# Altium PCB PCB.PcbDoc
Units mm, origin at the board's own origin, x right, y up, seen from the top; angles counter-clockwise.
Board outline 79.99 x 63.99 mm, 4 copper layers (Top Layer, GND, PWR, Bottom Layer), stack 1.57 mm thick; 44 components, 35 nets, 179 pads, 54 vias.
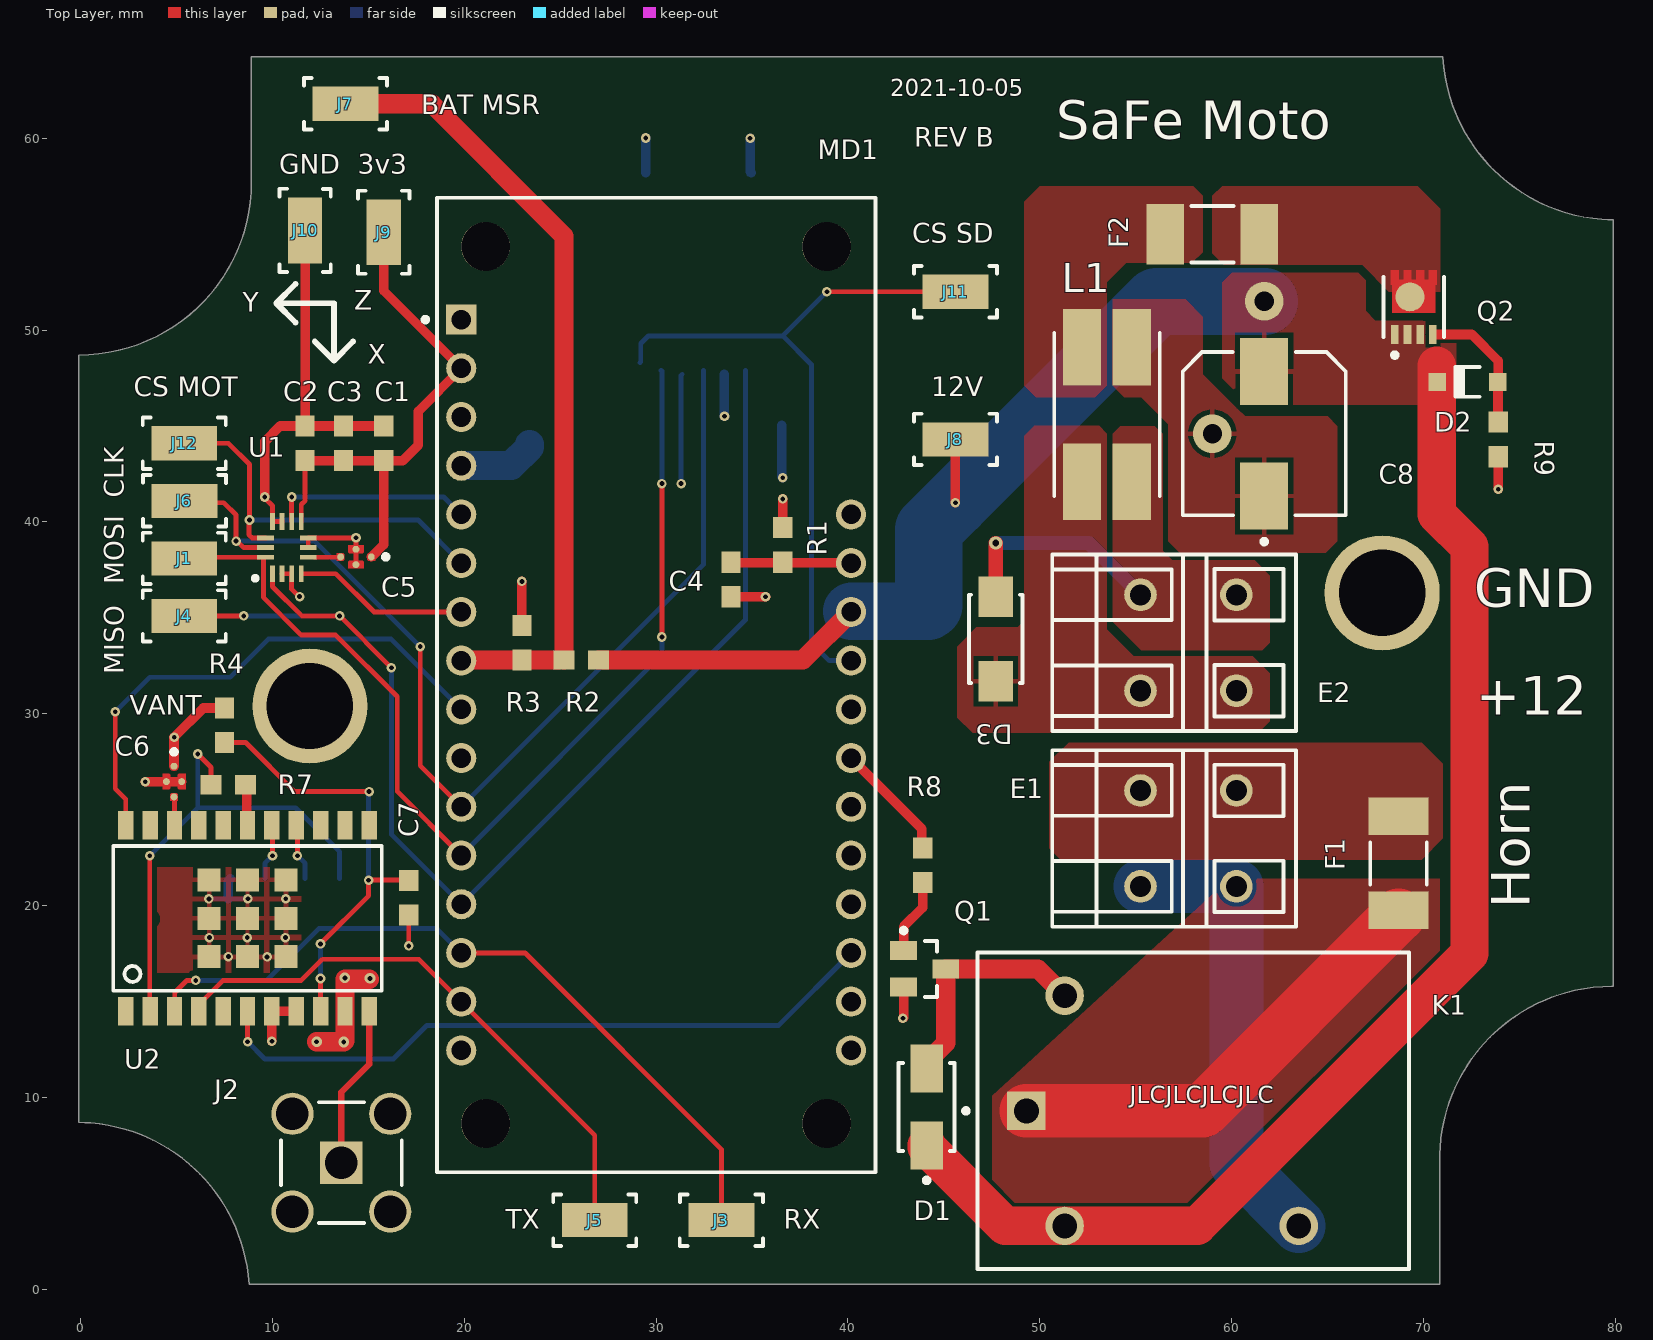
[diagram p0: Top Layer view]
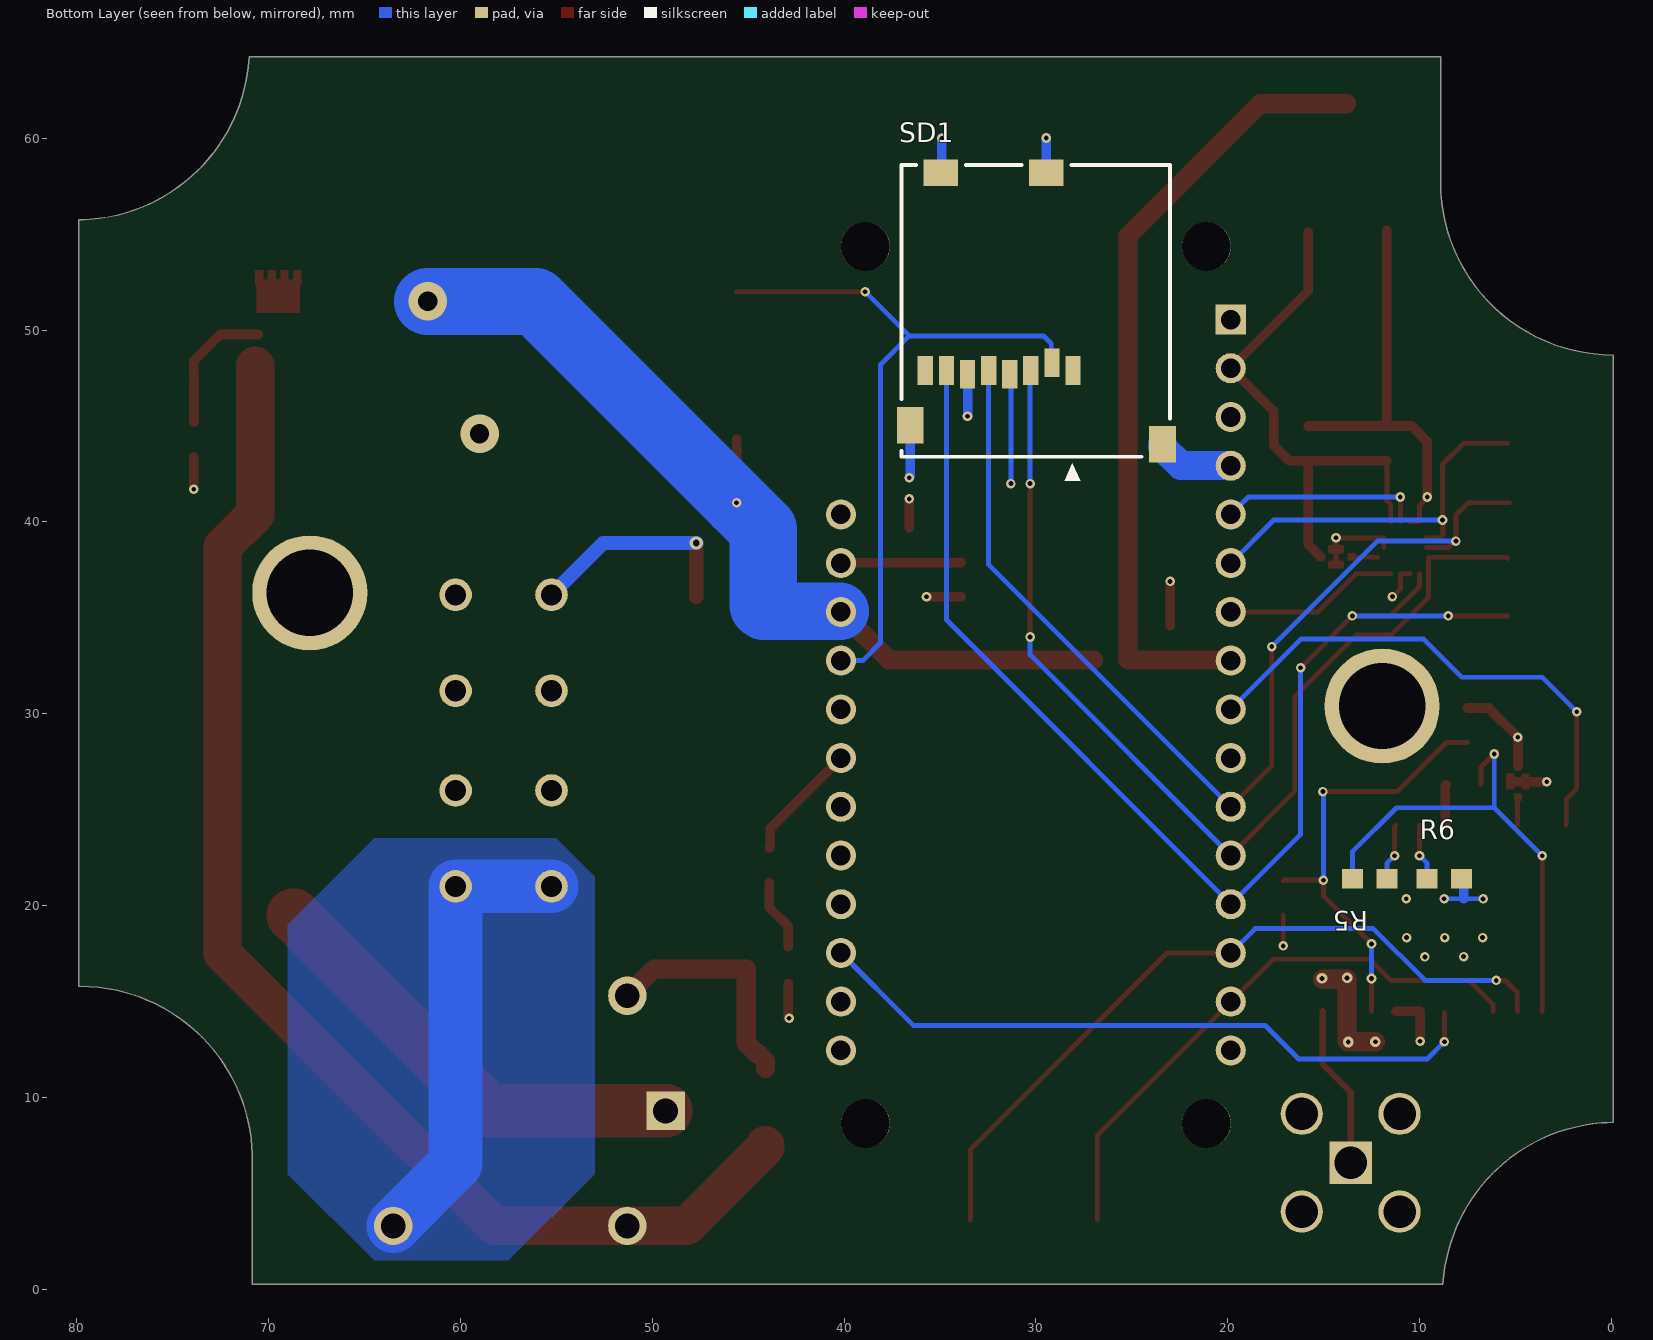
[diagram p1: Bottom Layer view, seen from below]
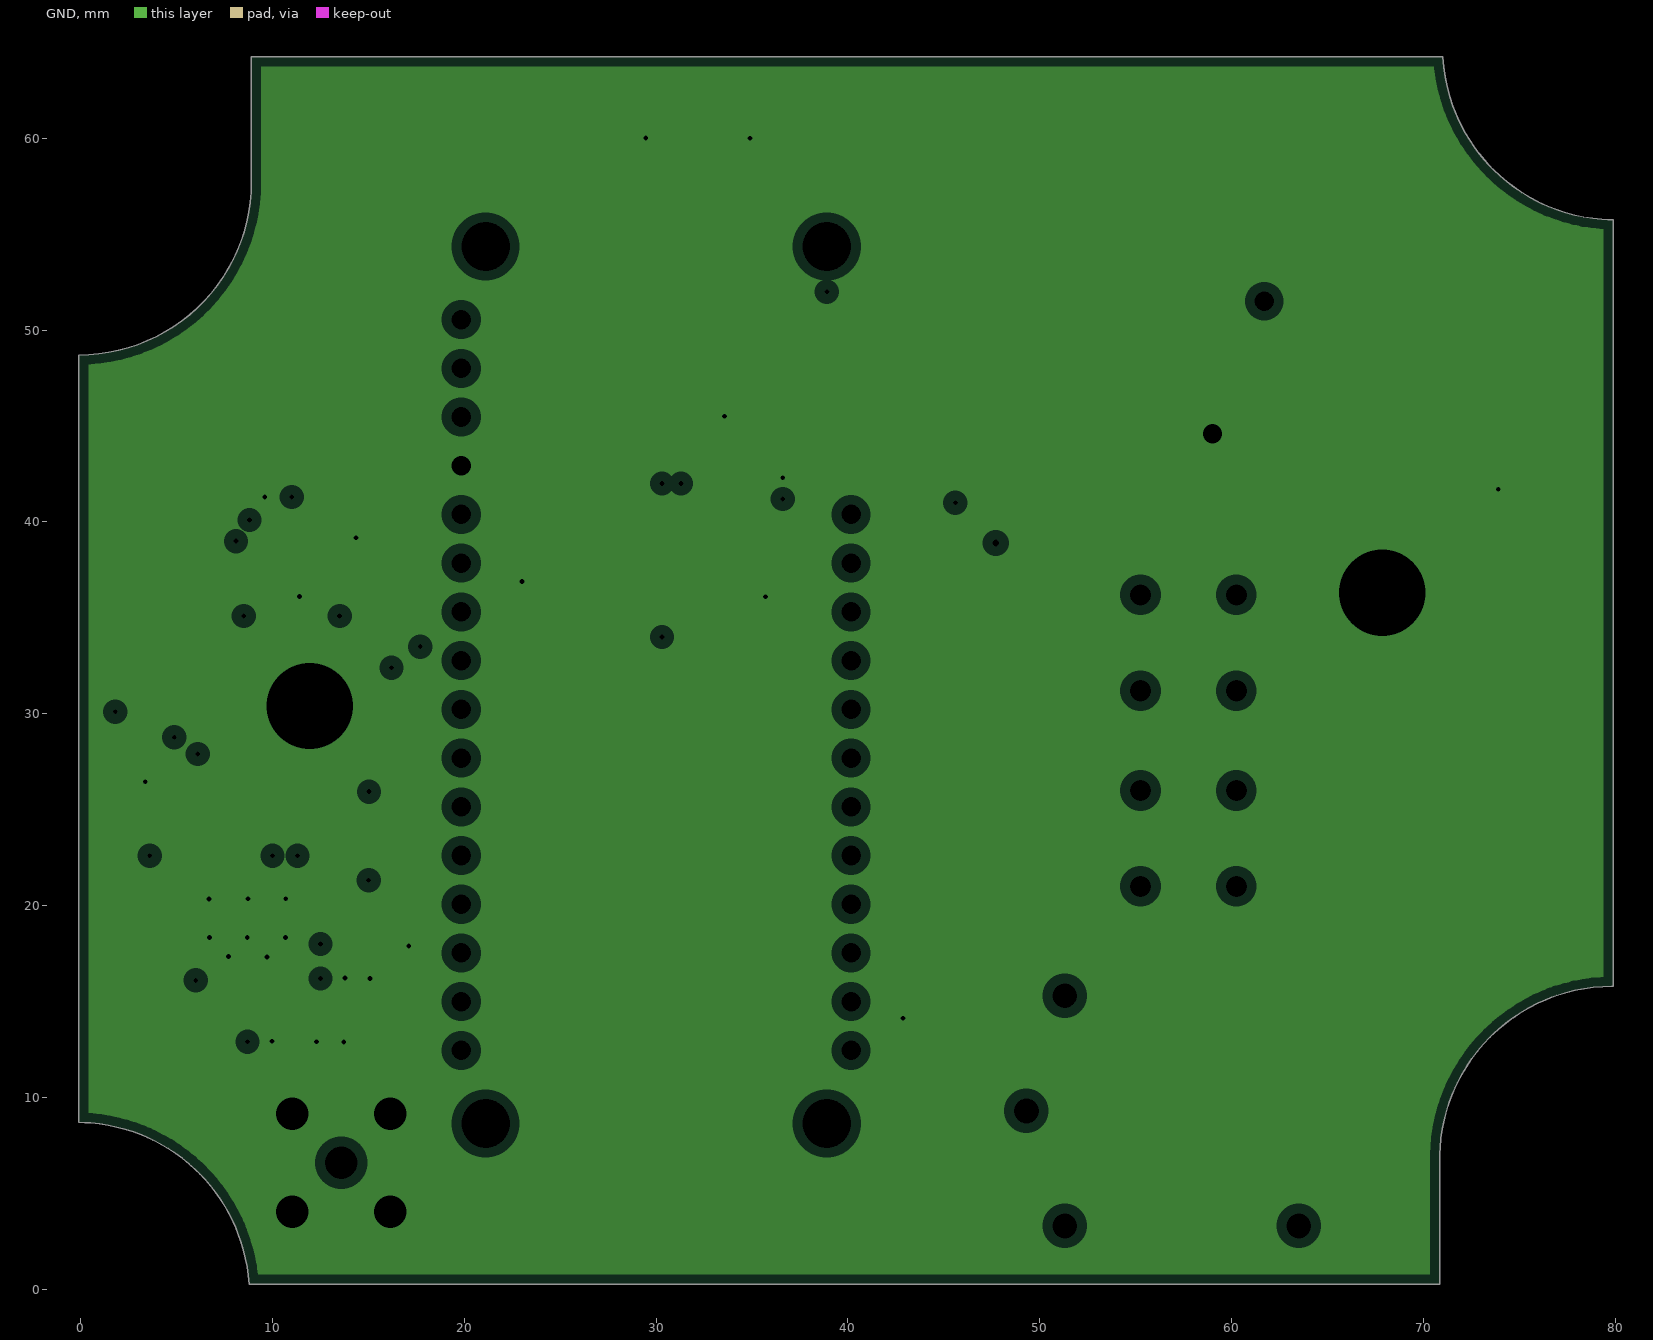
[diagram p2: GND, clearances drawn from the general rule]
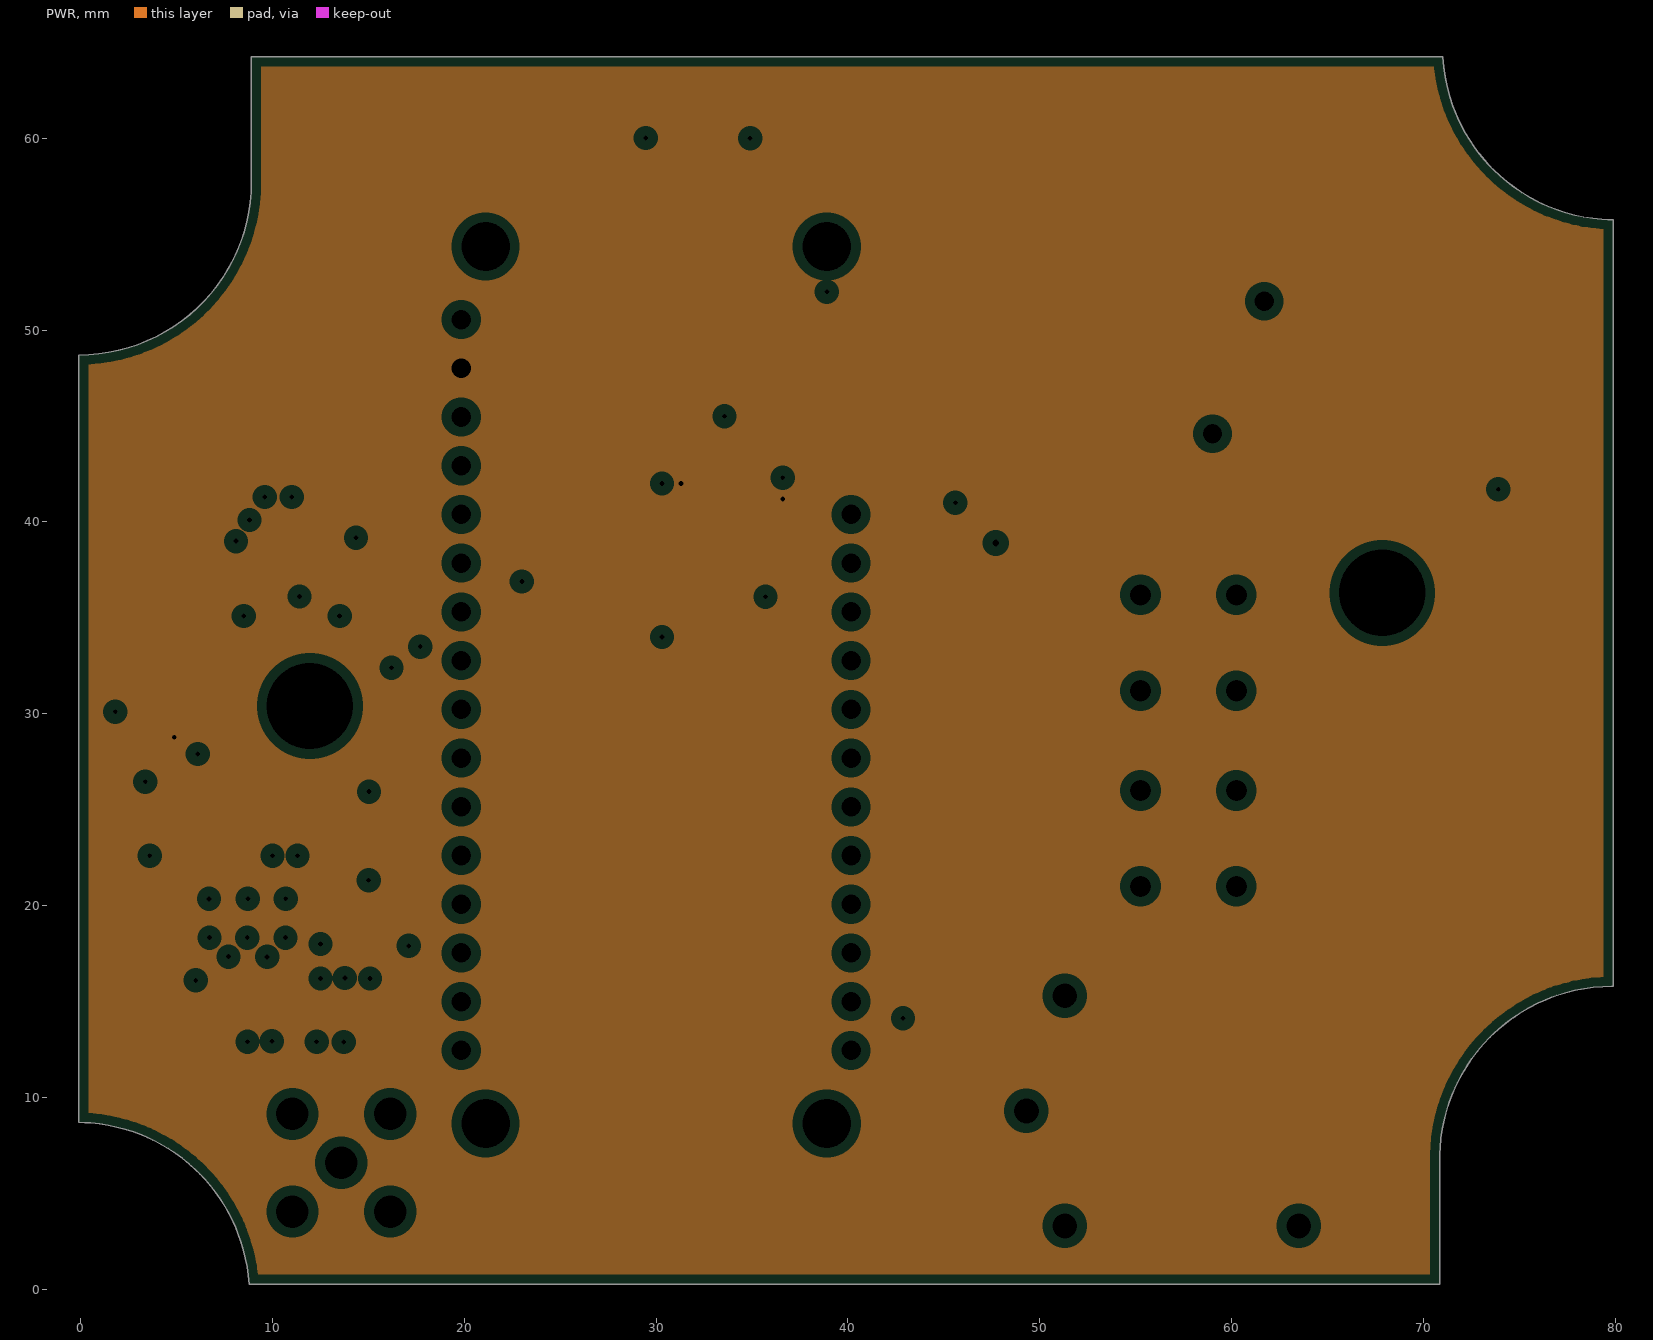
[diagram p3: PWR, clearances drawn from the general rule]
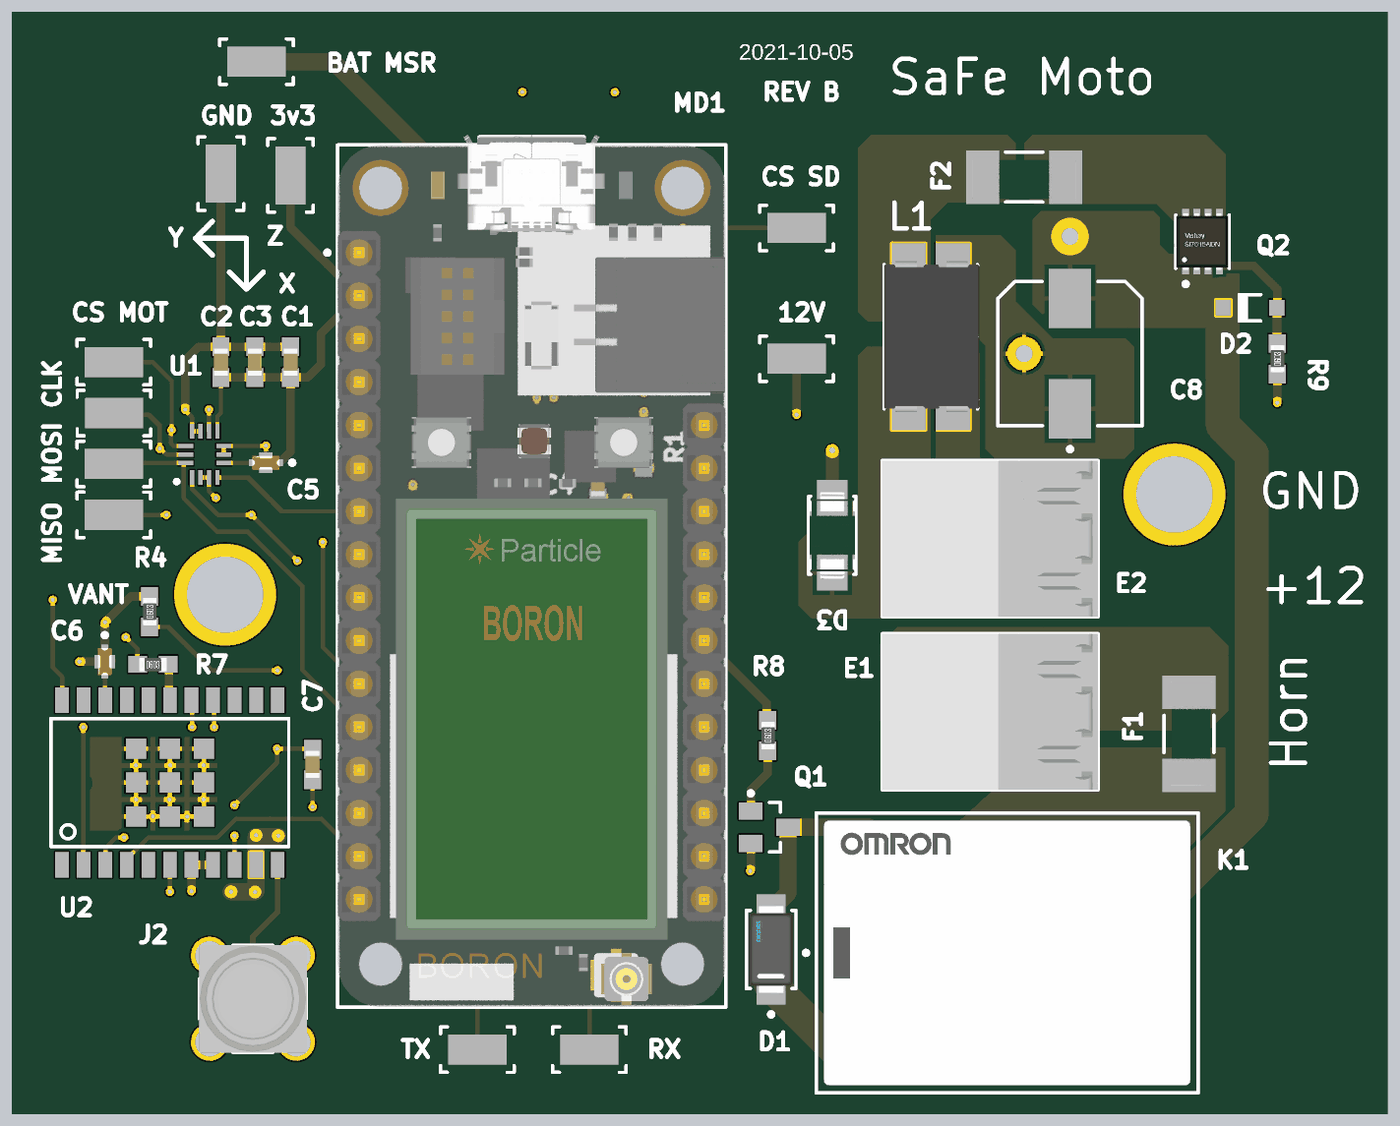
[diagram p4: 3D render of the assembled board from above, using the file's embedded part models]

## Layer stack, top to bottom
Top Solder: solder mask 0.0127, Solder Resist, Dk 3.8
Top Layer: signal copper 0.035
Dielectric 1: prepreg 0.2, 7628, Dk 4.6
GND: plane copper 0.0175, net GND
Core: core 1.065, FR-4, Dk 4.5
PWR: plane copper 0.0175, net +3v3
Dielectric 2: prepreg 0.2, 7628, Dk 4.6
Bottom Layer: signal copper 0.035
Bottom Solder: solder mask 0.0127, Solder Resist, Dk 3.8

## Board outline
6.44,5.769 cw(c-0.23,-0.317) 7.947,3.514 cw(c-0.157,-0.277) 8.199,2.918 cw(c-0.235,-0.307) 8.777,0.269 8.777,0.255 70.845,0.255 70.845,6.789 cw(c79.782,6.789) 70.864,7.382 cw(c79.878,6.782) 71.524,10.22 cw(c79.787,6.813) 71.775,10.774 cw(c79.872,6.77) 73.471,13.143 cw(c79.798,6.835) 73.914,13.559 cw(c79.863,6.761) 76.387,15.099 cw(c79.819,6.85) 76.956,15.313 cw(c79.851,6.756) 79.831,15.789 79.845,15.789 79.895,15.789 79.895,55.745 cw(c79.995,64.686) 79.303,55.771 cw(c80.002,64.776) 76.517,56.444 cw(c79.972,64.689) 75.96,56.7 cw(c80.013,64.771) 73.641,58.371 73.631,58.381 cw(c79.963,64.712) 73.192,58.852 cw(c80.018,64.76) 71.783,61.061 cw(c79.951,64.725) 71.534,61.677 cw(c80.022,64.751) 71.009,64.237 71.008,64.25 8.9,64.25 8.9,57.7 cw(c-0.1,57.7) -0.1,48.7 -0.1,8.699 cw(c-0.205,-0.248) 0.533,8.67 cw(c-0.212,-0.33) 3.171,8.043 cw(c-0.186,-0.251) 3.761,7.779 cw(c-0.222,-0.325) 5.988,6.23 cw(c-0.17,-0.261)

## Design rules (kind name [scope] priority, off if disabled: settings)
BoardOutlineClearance [All] p1: gap=0.5 ignorepadtopadclearanceinfootprint=FALSE
Clearance [InNetClass('All Nets')] p1: gap=0.2 ignorepadtopadclearanceinfootprint=TRUE except(0: Arc-Hole Track-Hole SMDPad-Hole THPad-Hole Via-Hole Fill-Hole Poly-Hole Region-Hole Text-Hole; 0.13: Arc-Arc Arc-Track Arc-SMDPad Track-Track Track-SMDPad SMDPad-SMDPad; 0.254: Arc-Via Arc-Text Track-Via Track-Text SMDPad-Via SMDPad-Text THPad-Via THPad-Text Via-Via Via-Text Fill-Text Poly-Text Region-Text Text-Text; 0.3: Via-Fill Via-Poly Via-Region; 0.5: THPad-THPad)
HoleSize [All] p1: absolutevalues=TRUE maxlimit=6.3 minlimit=0.025 maxpercent=80.000 minpercent=20.000
HoleToHoleClearance [All] p1: gap=0.5 allowstackedmicrovias=FALSE
PlaneClearance [All] p1: clearance=0.508
PlaneConnect [All] p1: planeconnectstyle=Relief reliefexpansion=0.508 reliefentries=4 reliefconductorwidth=0.254 reliefairgap=0.254
PolygonConnect [All] p1: connectstyle=Relief reliefconductorwidth=0.254 reliefentries=4 polygonreliefangle="90 Angle" airgapwidth=0.254
RoutingVias RoutingVias_1 [InNetClass('High Power')] p1: holewidth=4 width=3 viastyle="Through Hole" minholewidth=1 minwidth=2 maxholewidth=4 maxwidth=6
RoutingVias [All] p2: holewidth=0.25 width=0.5 viastyle="Through Hole" minholewidth=0.25 minwidth=0.5 maxholewidth=2 maxwidth=4
SolderMaskExpansion [All] p1: expansion=0.102 istentingtop=FALSE
Width GPS [InNetClass('RF')] p1: maxlimit=0.336 minlimit=0.336 preferedwidth=0.336 impedanceprofiledriven=TRUE impedanceprofileid={6959D812-79C8-45D8-8F7B-22DE37652A4B} impedanceprofilevalue=50.000000 minimp=50.000000 maximp=50.000000 favimp=50.000000
Width Horn [InNetClass('High Power')] p2: maxlimit=3.5 minlimit=2.8 preferedwidth=3 minimp=50.000000 maximp=50.000000 favimp=50.000000
Width [All] p3: maxlimit=5 minlimit=0.13 preferedwidth=0.254 minimp=50.000000 maximp=50.000000 favimp=50.000000
26 further rules are at their usual default settings.

## Classes and differential pairs
component class Power: C8 D2 D3 E2 F2 L1 Q2 R9
net class RF: NetJ2_1
net class "High Power": NetE1_A1 NetF1_1
component class Main: C1 C2 C3 C4 C5 C6 C7 D1 E1 F1 J1 J2 J3 J4 J5 J6 J7 J8 J9 J10 J11 J12 K1 MD1 Q1 R1 R2 R3 R4 R5 R6 R7 R8 SD1 U U1 U2

## Components (designator, comment, footprint, x,y, rotation, side; value= is the part's Value field where it differs from the comment)
C1 "Cap SMD" "C0603 (1608)" 15.8,44.1 r270 top value=2.2uF
C2 "Cap SMD" "C0603 (1608)" 11.7,44.1 r270 top value=100nF
C3 "Cap SMD" "C0603 (1608)" 13.7,44.1 r270 top value=10nF
C4 "Cap SMD" "C0603 (1608)" 33.9,37 r90 top value=10nF
C5 "NFM18PS105R0J3D" FP-NFM18-0_1-e0_05_0_35-MFG 14.35,38.175 r180 top
C6 "NFM18PS105R0J3D" FP-NFM18-0_1-e0_05_0_35-MFG 4.866,26.463 r270 top
C7 "Cap SMD" "C0603 (1608)" 17.1,20.4 r90 top value=10nF
C8 "UUD1A471MNL1GS" FP-UUD1A471MNL1GS-MFG 61.7,44.6 r90 top
D1 "ES2BA-13-F" FP-SMA-MFG 44.1,9.5 r90 top value=25pF
D2 "BZT52C16-7-F" DIOD-SOD123-2_V 72.3,47.3 r180 top
D3 "SMAJ24CA" FP-SMAJ-CA-MFG 47.7,33.9 r270 top
E1 "1884340000" LSF_SMT_5_00_135_02 57,23.5 r90 top
E2 "1884340000" LSF_SMT_5_00_135_02 57,33.7 r90 top
F1 "0451005.MRL" FP-0451-MFG 68.7,22.2 r90 top value=0.0125Ω
F2 "0451005.MRL" FP-0451-MFG 59,55 r0 top value=0.0125Ω
J1 "5015" FP-5015-MFG 5.4,38.1 r0 top
J2 "1053354-1" TECO-1053354-1_V 13.586,6.595 r270 top
J3 "5015" FP-5015-MFG 33.4,3.6 r180 top
J4 "5015" FP-5015-MFG 5.4,35.1 r0 top
J5 "5015" FP-5015-MFG 26.8,3.6 r180 top
J6 "5015" FP-5015-MFG 5.407,41.099 r0 top
J7 "5015" FP-5015-MFG 13.8,61.8 r180 top
J8 "5015" FP-5015-MFG 45.6,44.3 r180 top
J9 "5015" FP-5015-MFG 15.8,55.1 r90 top
J10 "5015" FP-5015-MFG 11.7,55.2 r90 top
J11 "5015" FP-5015-MFG 45.6,52 r0 top
J12 "5015" FP-5015-MFG 5.4,44.1 r0 top
K1 "G5LE-1A-E-DC12" FP-G5LE-1A-E-DC12-MFG 58,9.3 r180 top
L1 "7427521" WE-CMS 53.5,45.6 r90 top
MD1 "BRN402" FP-BRN402-0 30,31.5 r0 top locked
Q1 "BSS123" FAIR-SOT23-3_V 44,16.7 r270 top
Q2 "SI7615ADN-T1-GE3" FP-S16-2667_SINGLE-MFG 69.5,51.2 r90 top
R1 "Res" "R0603 (1608)" 36.6,38.8 r90 top
R2 "Res" "R0603 (1608)" 26.1,32.8 r0 top
R3 "Res" "R0603 (1608)" 23,33.7 r270 top
R4 "Res" "R0603 (1608)" 7.5,29.4 r90 top
R5 "Res" "R0603 (1608)" 12.6,21.4 r0 bottom
R6 "Res" "R0603 (1608)" 8.7,21.4 r180 bottom
R7 "Res" "R0603 (1608)" 7.7,26.3 r0 top
R8 "Res" "R0603 (1608)" 43.9,22.1 r90 top
R9 "Res" "R0603 (1608)" 73.9,44.3 r90 top
SD1 "2908-05WB-MG" 3M-2908-05WB-MG_V 30,51 r0 bottom
U1 "ICM-42688-P" ICM-42688-P 10.75,38.66 r90 top
U2 "A2200-A" XCVR_A2200-A 8.698,19.336 r90 top

## Footprints (in the part's own frame and the unit in brackets; to place one, negate y for a bottom-side part, rotate by r counter-clockwise, add the part's x,y. Pads: shape width x height; smd on the part's side, far side on the other; paste and mask are expansions set on the pad)
3M-2908-05WB-MG_V [mm] "Connector, MicroSD, 8 Position, Body 15.2x14mm, Pitch 1.1mm"
  rect 0.8x1.5 smd: 1(-1.94,3.1) 2(-0.84,2.7) 3(0.26,3.1) 4(1.36,3.3) 5(2.46,3.1) 6(3.56,3.3) 7(4.66,3.1) 8(5.76,3.1)
  rect 1.4x1.9 smd: 9(6.55,5.95) 12(-6.6,6.95)
  rect 1.8x1.4 smd: 10(4.95,-7.2) 11(-0.55,-7.2)
  silkscreen extent -7,-7.6 7,8.87, body extent -7,-7.6 7,7.6, height 1.85
"C0603 (1608)" [mm] "Chip Capacitor, 2-Leads, Body 1,60x0,81mm, IPC Low Density"
  rect 1.1x1 smd: 1(-0.9,0) 2(0.9,0)
  body extent -0.8,-0.41 0.8,0.42, height 0.79
DIOD-SOD123-2_V [mm] "SOD123, 2-Leads, Body 2.7x1.55mm, Height 1.45mm"
  rect 0.9x0.95 smd: 1(-1.575,0) 2(1.575,0)
  silkscreen extent -0.64,-0.82 0.64,0.77, body extent -1.35,-0.77 1.35,0.77, height 1.45
FAIR-SOT23-3_V [mm] "SOT23, 3-Leads, Body 2.92x1.3mm, Pitch 0.95mm"
  rect 1x1.4 smd: 1(-0.95,-1.1) 2(0.95,-1.1) 3(0,1.1)
  silkscreen extent -2.12,-1.22 1.46,0.65, body extent -1.46,-0.65 1.46,0.65, height 1.2
FP-0451-MFG [mil]
  rect 77x124 smd paste+0 mask+0: 1(-96.5,0) 2(96.5,0)
  silkscreen extent -43,-58 43,58, body extent -139,-66 139,66, height 10
FP-5015-MFG [mm]
  rect 3.43x1.78 smd paste+0 mask+0: 1(0,0)
  silkscreen extent -2.16,-1.34 2.17,1.34
FP-BRN402-0 [mm]
  rect 1.57x1.57 hole 1.02 paste-1000 mask+0: 1(-10.16,19.05)
  round 1.57 hole 1.02 paste-1000 mask+0: 2(-10.16,16.51) 3(-10.16,13.97) 4(-10.16,11.43) 5(-10.16,8.89) 6(-10.16,6.35) 7(-10.16,3.81) 8(-10.16,1.27) 9(-10.16,-1.27) 10(-10.16,-3.81) 11(-10.16,-6.35) 12(-10.16,-8.89) 13(-10.16,-11.43) 14(-10.16,-13.97) 15(-10.16,-16.51) 16(-10.16,-19.05) 17(10.16,-19.05) 18(10.16,-16.51) 19(10.16,-13.97) 20(10.16,-11.43) 21(10.16,-8.89) 22(10.16,-6.35) 23(10.16,-3.81) 24(10.16,-1.27) 25(10.16,1.27) 26(10.16,3.81) 27(10.16,6.35) 28(10.16,8.89)
  round 2.54 hole 2.54 unplated paste-1000 mask+0: ""(-8.89,-22.86) ""(-8.89,22.86) ""(8.89,-22.86) ""(8.89,22.86)
  silkscreen extent -12.15,-25.4 11.43,25.4, body extent -11.43,-25.4 11.43,26, height 8.93
FP-G5LE-1A-E-DC12-MFG [mm]
  rect 2x2 hole 1.3 paste-1000 mask+0: 1(8.7,0)
  round 2 hole 1.3 paste-1000 mask+0: 2(6.7,6) 3(-5.5,6) 5(6.7,-6)
  silkscreen extent -11.25,-8.25 11.97,8.25, body extent -11.35,-8.35 11.35,8.35, height 0.25
FP-NFM18-0_1-e0_05_0_35-MFG [mm]
  round 0.36 smd paste+0 mask+0: 1(-0.8,0) 2(0,0.4) 2(0,-0.4) 3(0.8,0)
  Top Layer region: -1,-0.2 -1,0.2 -0.65,0.2 -0.6,0.15 -0.6,-0.15 -0.65,-0.2 -1,-0.2
  Top Layer region: 1,-0.2 1,0.2 0.65,0.2 0.6,0.15 0.6,-0.15 0.65,-0.2 1,-0.2
  Top Layer region: -0.4,0.6 0.4,0.6 0.4,0.25 0.35,0.2 -0.35,0.2 -0.4,0.25 -0.4,0.6
  Top Layer region: -0.4,-0.6 0.4,-0.6 0.4,-0.25 0.35,-0.2 -0.35,-0.2 -0.4,-0.25 -0.4,-0.6
  silkscreen extent -1.68,-0.12 -1.43,0.12, body extent -1.1,-0.7 1.1,0.7, height 0.25
FP-S16-2667_SINGLE-MFG [mil]
  rect 39x16 smd paste+0 mask+0: 1(-56.5,39) 2(-56.5,13) 3(-56.5,-13) 4(-56.5,-39)
  round 59.4 smd paste+0 mask+0: 5-6-7-8(21,8)
  Top Layer region: -12,44 46,44 46,47 76,47 76,31 56,31 56,21 76,21 76,5 56,5 56,-5 76,-5 76,-21 56,-21 56,-31 76,-31 76,-47 46,-47 46,-44 -12,-44
  silkscreen extent -103,-62 62,62, body extent -80,-71 80,71, height 10
FP-SMA-MFG [mm]
  rect 2.5x1.7 smd paste+0 mask+0: 1(-2,0) 2(2,0)
  silkscreen extent -3.95,-1.46 2.3,1.46, body extent -3.35,-1.56 3.35,1.56, height 0.25
FP-SMAJ-CA-MFG [mm]
  rect 2.1x1.8 smd paste+0 mask+0: 1(-2.2,0) 2(2.2,0)
  silkscreen extent -2.3,-1.4 2.3,1.4, body extent -3.35,-1.5 3.35,1.5, height 0.25
FP-UUD1A471MNL1GS-MFG [mm]
  rect 3.5x2.5 smd paste+0 mask+0: 1(-3.25,0) 2(3.25,0)
  silkscreen extent -5.75,-4.25 4.25,4.25
ICM-42688-P [mm]
  rect 0.875x0.25 smd: 1(-1.36,0.75) 2(-1.36,0.25) 3(-1.36,-0.25) 4(-1.36,-0.75) 8(1.36,-0.75) 9(1.36,-0.25) 10(1.36,0.25) 11(1.36,0.75)
  rect 0.25x0.875 smd: 5(-0.5,-1.113) 6(0,-1.113) 7(0.5,-1.113) 12(0.5,1.113) 13(0,1.113) 14(-0.5,1.113)
  silkscreen extent -1.7,1.55 -1.5,1.75, body extent -1.5,-1.25 1.5,1.25, height 0.8
LSF_SMT_5_00_135_02 [mm] "OMNIMATE Signal - Serie LSF  LSF-SMT 5.00/02/135 3.5"
  round 1.7 hole 1.1: A1(-2.5,1.75) A1(-2.5,-3.25) A2(2.5,1.75) A2(2.5,-3.25)
  silkscreen extent -4.6,-6.35 4.6,6.35, body extent -4.6,-6.35 4.6,6.35, height 13.17
"R0603 (1608)" [mm]
  rect 1.1x1 smd: 1(-0.9,0) 2(0.9,0)
  body extent -0.8,-0.42 0.8,0.38, height 0.45
TECO-1053354-1_V [mm] "THD, 5-Leads, Body 6.3x6.3mm, Pitch 2.55mm"
  rect 2.2x2.2 hole 1.7: 1(0,0)
  round 2.2 hole 1.7: 2(-2.55,2.55) 3(-2.55,-2.55) 4(2.55,-2.55) 5(2.55,2.55)
  silkscreen extent -3.15,-3.15 3.15,3.15, body extent -3.17,-3.17 3.18,3.18, height 9.6
WE-CMS [mm] "Inductor, 4-Leads, Body 8.5x5.6mm"
  rect 4x2 smd: 1(-3.5,1.3) 2(3.5,1.3) 3(-3.5,-1.3) 4(3.5,-1.3)
  silkscreen extent -4.25,-2.75 4.25,2.75, body extent -4.45,-2.85 4.45,2.75, height 3.19
XCVR_A2200-A [mm]
  rect 1.5x0.8 smd: 1(-4.85,6.35) 2(-4.85,5.08) 3(-4.85,3.81) 4(-4.85,2.54) 5(-4.85,1.27) 6(-4.85,0) 7(-4.85,-1.27) 8(-4.85,-2.54) 9(-4.85,-3.81) 10(-4.85,-5.08) 11(-4.85,-6.35) 12(4.85,-6.35) 13(4.85,-5.08) 14(4.85,-3.81) 15(4.85,-2.54) 16(4.85,-1.27) 17(4.85,0) 18(4.85,1.27) 19(4.85,2.54) 20(4.85,3.81) 21(4.85,5.08) 22(4.85,6.35)
  rect 1.2x1.2 smd: 23(-2,2) 24(-2,0) 25(-2,-2) 26(0,-2) 27(0,0) 28(0,2) 29(2,2) 30(2,0) 31(2,-2)
  silkscreen extent -3.77,-7 3.77,7

## Part data
C5 C6: library part CMP-2000-06844-3, "Large Current 3 Terminals Low ESL Chip Multilayer Ceramic Capacitors for General Purpose, 0603, 1uF, 20%, 6.3V", Capacitance=1uF, Case Code (Imperial)=0603, Case Code (Metric)=1608, Current=2A, DC Resistance (DCR)=30mR, Insulation Resistance=500MR, Max Operating Temperature=105°C, Max Voltage Rating (DC)=6.3V, Min Operating Temperature=-55°C, Package Quantity=1, Tolerance=20%, Case/Package=0603, Current Rating=2A, Depth=0.8mm, Height=0.6mm, Lead Free="Lead Free", Length=1.6mm, Max Current Rating=2A, Mount="Surface Mount", Packaging="Tape and Reel", Radiation Hardening=No, REACH SVHC="No SVHC", Termination=Flat, Voltage=6.3V, Voltage Rating=6.3V, Voltage Rating (DC)=6.3V, Weight=7.1E-05oz, Width=0.8mm
C8: library part CMP-0687-00070-2, "CAP ALUM 470UF 20% 10V SMD", Capacitance=470uF, Case/Package=Radial, Dielectric Material=Aluminium, Leakage Current=3uA, Max Operating Temperature=105°C, Min Operating Temperature=-55°C, Package Quantity=500, Ripple Current=450mA, Tolerance=20%, Voltage=10V, Diameter=8mm, Dissipation Factor=0.24%, Height=10mm, Height - Seated (Max)=0.394inch, Impedance=170mR, Lead Diameter=1.1mm, Lead Free="Lead Free", Lead Pitch=3.1mm, Length=10mm, Life (Hours)=5000Hour, Number of Pins=2, Packaging="Tape and Reel", Radiation Hardening=No, REACH SVHC="No SVHC", Ripple Current (AC)=450mA, Termination=SMD/SMT, Voltage Rating=10V, Voltage Rating (DC)=10V
D1: library part CMP-12791-000037-1, "DIODE GEN PURP 100V 2A SMA", Capacitance=25pF, Forward Current=2A, Manufacturer="Diodes Inc.", Max Junction Temp=+150°C, Max Repetitive Reverse Voltage=100V, Max Surge Forward Current=50A, Package=SMA, Peak Reverse Current=5uA, Temperature="-55°C to +150°C", Temperature Range Low=-55°C, Automotive=No, Category=Diode, ComponentLink2Description=Datasheet, ComponentLink2URL=https://www.diodes.com/assets/Datasheets/ds14002.pdf, Device Class L1="Discrete Semiconductors", Device Class L2=Diodes, Device Class L3="Rectifier Diodes", Digikey Description="DIODE GEN PURP 100V 2A SMA", Footprint Url=https://www.diodes.com/assets/Package-Files/SMA.pdf, Height=2.4mm, Lead Free=Yes, Manufacturer Part Number=ES2BA-13-F, Mouser Description="ES2BA Series 100 V 2 A Surface Mount Super-Fast Rectifier - DO-214AC", Octopart=https://octopart.com/es2ba-13-f-diodes+inc.-14402013, Reverse Voltage=100V, RoHS=TRUE, Standoff Height=0.05mm, Temperature Range High=+150°C
D2: library part CMP-0860-00001-1, "Surface Mount Zener Diode, 16 V, -65 to 125 degC, SOD123, RoHS, Tape and Reel", Manufacturer="Diodes Inc", Maximum Reverse Current="0.1 uA", Operating Temperature="-65 to 150 degC", Power Max="500 mW", Voltage Zener="16 V Typ.", ComponentLink1Description="Manufacturer URL", ComponentLink1URL=http://www.diodes.com/, ComponentLink2Description=Datasheet, ComponentLink2URL=http://www.diodes.com/datasheets/ds18004.pdf, ComponentLink3Description="Package Specification", ComponentLink3URL=http://www.diodes.com/datasheets/ap02002.pdf, DatasheetVersion="Rev. 37-2", Maximum Zener Impedance f="1 kHz ZZK=200 Ohm", Mounting Technology="Surface Mount", PackageDescription="2-Pin SOD123, Body 2.7 x 1.55 mm, Height 1.45 mm", PackageReference=SOD123, PackageVersion="Rev. 79", Packing="Tape and Reel", PartNumber=BZT52C16-7-F, RoHS=TRUE, Tol V="5.56% Typ."
D3: library part CMP-2000-07087-2, "TVS DIODE 24V 38.9V DO214AC", Breakdown Voltage=26.7V, Clamping Voltage=38.9V, Manufacturer=Littelfuse, Max Junction Temp=+150°C, Package=SMAJ-CA, Peak Pulse Current=10.3A, Peak Pulse Power=400W, Reverse Standoff Voltage=24V, Temperature="-65°C to +150°C", Temperature Range Low=-65°C, Automotive=No, Category=Diode, ComponentLink2Description=Datasheet, ComponentLink2URL=https://www.littelfuse.com/~/media/electronics/datasheets/tvs_diodes/littelfuse_tvs_diode_smaj_datasheet.pdf.pdf, Device Class L1="Circuit Protection", Device Class L2="TVS Diodes", Device Class L3=unset, Digikey Description="TVS DIODE 24V 38.9V DO214AC", Direction=Bidirectional, Height=2.29mm, Lead Free=Yes, Manufacturer Part Number=SMAJ24CA, Mouser Description="In a Pack of 25, Littelfuse SMAJ24CA, Bi-Directional TVS Diode, 400W, 2-Pin DO-214AC", Number Of Channels=1, Octopart=https://octopart.com/smaj24ca-littelfuse-350011, RoHS=TRUE, Temperature Range High=+150°C
E1 E2: library part CMP-1559-02276-1, "OMNIMATE Signal - series LSF", Colour=Black, Manufacturer=Weidmueller, Rated_current_min_no_of_poles_TU_20_deg_C="19 A", Rated_current_use_group_B_UL_1059="12 A", Rated_voltage_for_surge_voltage_class_pollution_degree_II_2="500 V", Rated_voltage_use_group_B_UL_1059="300 V", UL_94_flammability_rating=V-0, ComponentLink1Description="Manufacturer URL", ComponentLink1URL=http://www.weidmueller.com/, ComponentLink2Description="URL Link1", ComponentLink2URL=http://catalog.weidmueller.com/catalog/Start.do?localeId=en&ObjectID=1884340000, Contact_material=Cu-Leg, Contact_surface=tinned, Insulating_material="LCP GF", Mounting_onto_the_PCB="Reflow solder connection", No_of_poles=2, PackageReference=LSF_SMT_5_00_135_02, Packaging=Tube, PartNumber=1884340000, Pitch_inch="0,197 inch", Pitch_mm="5 mm", Qty="60 PCS", Revision=V1, Short_text_for_material="LSF-SMT 5.00/02/135 3.5SN BK TU", Side_termination_characteristic="closed side", Solder_pin_length_mm="3,5 mm", Solid_max_H05_07_V_U="1,5 mm²", Solid_min_H05_07_V_U="0,2 mm²", Wire_cross_section_AWG_max_UL_1059="AWG 16", Wire_cross_section_AWG_min_UL_1059="AWG 24"
F1 F2: library part CMP-2000-05653-2, "FUSE BRD MNT 5A 125VAC/VDC 2SMD", Fuse Current=5A, Fuse Interrupt Ac Current=50A, Manufacturer="Littelfuse Inc", Max Fuse Ac Voltage=125V, Package=0451, Resistance=0.0125Ω, Temperature="-55°C to +125°C", Temperature Range High=+125°C, Temperature Range Low=-55°C, Automotive=No, Category=Fuse, ComponentLink2Description=Datasheet, ComponentLink2URL=https://www.littelfuse.com/~/media/electronics/datasheets/fuses/littelfuse_fuse_451_453_datasheet.pdf.pdf, Device Class L1="Circuit Protection", Device Class L2=Fuses, Device Class L3=unset, Digikey Description="FUSE BRD MNT 5A 125VAC/VDC 2SMD", Fuse Blow Speed=Fast, Fuse I2T=5.566A2Sec, Fuse Interrupt Dc Current=50A, Height=2.94mm, Lead Free=Yes, Manufacturer Part Number=0451005.MRL, Max Fuse Dc Voltage=125V, Mouser Description="Surface Mount Fuses 125V 5A", Octopart=https://octopart.com/0451005.mrl-littelfuse-566389, RoHS=TRUE, Voltage Rating=125V
J1 J3 J4 J5 J6 J7 J8 J9 J10 J11 J12: library part CMP-2000-05183-2, "PC TEST POINT MINIATURE", Manufacturer=keystone, Automotive=No, Category=Conn, ComponentLink2Description=Datasheet, ComponentLink2URL=http://www.keyelco.com/product-pdf.cfm?p=1353, Conn Orientation=Straight, Contact Material=Silver, Device Class L1=Connectors, Device Class L2=unset, Device Class L3=unset, Digikey Description="PC TEST POINT MINIATURE", Height=1.65mm, Lead Free=Yes, Manufacturer Part Number=5015, Number of contacts=1, Octopart=https://octopart.com/5015-keystone-3822, Package=5015, RoHS=TRUE
J2: library part CMP-2000-05830-1, "Female Coaxial Connector, Pitch 2.55 mm, Height 9.5 mm, Tail Length 3.9 mm, RoHS, Bulk", Manufacturer="TE Connectivity", Package Description="Female Coaxial Connector, Pitch 2.55 mm, Height 9.5 mm, Tail Length 3.9 mm", Standard Package=125, 3D Model=1053354-1.pdf, Category=Connectors,Interconnects, Connector Style=SMA, Connector Type=Jack,FemaleSockets, Contact Termination=Solder, Datasheet URL=http://www.te.com/commerce/DocumentDelivery/DDEController?Action=srchrtrv&DocNm=1053354&DocType=Customer+Drawing&DocLang=English, Datasheet Version="Rev. B, 05/2011", Dynamic Catalog=SMA, Family=CoaxialConnectors(RF), Fastening Type=Threaded, Impedance=50Ohm, Manufacturer URL=http://www.te.com/, Mounting Technology=ThroughHole, Mounting Type=ThroughHole, Other Names="2062000000 / A30046", Package Reference=1053354-1, Packaging=Bulk, RoHS Information=1053354-1StatementofCompliance, Series=SMA
K1: library part CMP-08822-000128-1, "RELAY GEN PURPOSE SPST 16A 12V", Coil Current=33.3mA, Coil Power=400mW, Coil Resistance=360R, Coil Voltage (DC)=12V, Contact Current Rating=16A, Max Operating Temperature=85°C, Max Voltage Rating (AC)=250V, Min Operating Temperature=-40°C, Package Quantity=100, Coil Type=Non-Latching, Contact Material=Tin, Depth=16.5mm, Height=19mm, Lead Free="Lead Free", Length=22.5mm, Max Current Rating=16A, Mount="Through Hole", Number of Pins=4, Operate Time=10ms, Packaging=Tray, Power Consumption=400mW, Relay Type="General Purpose", Release Time=5ms, RoHS Compliant=Yes, Series=G5LE, Termination=Solder, Throw Configuration=SPST, Voltage Rating (AC)=250V, Weight=12g, Width=16.5mm
L1: library part CMP-0220-00057-1, "Common Mode SMD Bead WE-CMS, Z = 52 Ohm", ComponentLink1Description="Manufacturer Link", ComponentLink1URL=http://www.we-online.com, ComponentLink2Description=Datasheet, ComponentLink2URL=http://www.we-online.de/katalog/media/pdf/7427521.pdf, DatasheetVersion="ver 8, Jul-2010", Impedance="52 Ohm", PackageDescription="Inductor, 4-Leads, Body 8.5 x 5.6 mm", PackageReference=WE-CMS, PackageVersion=2010
MD1: library part CMP-201502-000001-1, "BORON LTE", Manufacturer=Particle, Max Frequency=3000MHz, Max Supply Voltage=4.4V, Min Supply Voltage=3V, Nominal Supply Current=70-100000uA, Temperature="-20°C to +60°C", Temperature Range High=+60°C, Temperature Range Low=-20°C, Automotive=No, Bandwidth=2302MHz, Category=UNK, ComponentLink2Description=Datasheet, ComponentLink2URL=https://docs.particle.io/assets/pdfs/datasheets/boron-datasheet.pdf, Data Rate=2000kbits/s, Device Class L1="Integrated Circuits (ICs)", Device Class L2="RF Semiconductors and Devices", Device Class L3=Transceivers, Digikey Description="BORON LTE", Interface=I2C,SPI,UART,USB, Lead Free=Yes, Manufacturer Part Number=BRN402, Number Of Adc Channels=6, Number Of Gpio=20, Octopart=https://octopart.com/brn402-particle-96116406, Package=BRN402, RoHS=TRUE
Q1: library part CMP-2000-04934-1, "N-Channel Logic Level Enhancement Mode Field Effect Transistor, 1.7 V, -55 to 150 degC, 3-Pin SOT-23, RoHS, Tape and Reel", Manufacturer=Fairchild, Maximum Continuous Drain Current=0.17A, Maximum Drain Source Voltage=100V, Maximum Gate Source Voltage=±20V, Operating Temperature=-55to150degC, Package=3SOT-23, Package Description="3-Pin Small Outline Transistor, Body 2.92 x 1.325 mm, Pitch 0.95 mm", Package Reference=SOT23-3, Package Version="Rev. 12, 03/2016", Category=MOSFET, Channel Mode=Enhancement, Channel Type=N, Datasheet URL=https://www.fairchildsemi.com/datasheets/BS/BSS123.pdf, Datasheet Version=Jun-03, Manufacturer URL=https://www.fairchildsemi.com/, Mounting=SurfaceMount, Package URL=http://www.fairchildsemi.com/dwg/MA/MA03D.pdf, Packaging=Tape&Reel, Rad Hard=No, RDS-on=6000@10VmOhm, Typical Fall Time=2.4ns, Typical Rise Time=9ns, Typical Turn-Off Delay Time=17ns, Typical Turn-On Delay Time=1.7ns
Q2: library part CMP-02550-000167-1, "MOSFET P-CH 20V 35A 1212-8S", Continuous Drain Current=-22.1A, Drain To Source Breakdown Voltage=-20V, Drain To Source Resistance=0.0035Ω, Gate To Source Voltage=12V, Input Capacitace At Vds="5590pF @ -10V", Manufacturer=Vishay, Max Forward Diode Voltage=-1.1V, Max Junction Temp=+150°C, Package=S16-2667_SINGLE, Power Dissipation=3.7W, Pulse Drain Current=-80A, Temperature="-55°C to +150°C", Temperature Range Low=-55°C, Typ Forward Diode Voltage=-0.72V, Automotive=No, Category=Trans, ComponentLink2Description=Datasheet, ComponentLink2URL=http://www.vishay.com/docs/62667/si7615adn.pdf, Depletion Mode=False, Device Class L1="Discrete Semiconductors", Device Class L2=Transistors, Device Class L3=MOSFETs, Digikey Description="MOSFET P-CH 20V 35A 1212-8S", Drain To Source Voltage=-20V, Gate Charge At Vgs="122nC @ -10V", Height=1.12mm, Lead Free=Yes, Manufacturer Part Number=SI7615ADN-T1-GE3, Mouser Description="MOSFET -20V 4.4mOhm@10V 35A P-Ch G-III", Number Of Channels=1, Number Of P Channels=1, Octopart=https://octopart.com/si7615adn-t1-ge3-vishay-45331111, Reverse Recovery Charge=11nC, Reverse Recovery Time=27ns, RoHS=TRUE, Rthja Max=33°C/W, Standoff Height=0mm, Temperature Range High=+150°C, Threshold Vgs Max=-1.5V, Threshold Vgs Min=-0.4V, Transconductance=82S, Turn Off Delay Time=85ns, Turn On Delay Time=13ns
R1 R2 R3 R4 R5 R6 R7 R8 R9: library part "Resistor EU"
SD1: library part CMP-2000-05030-1, "Card Connector Micro-SD, 500 VAC, 100 mOhm Min, 0.5 A, RoHS, Tape and Reel", Manufacturer=3M, Package Description="8-Pin Surface Mount Device, Body 15.2 x 14 mm, Pitch 1.1 mm", Standard Package=1, Card Type=SecureDigital-microSD™, Catalog Drawings=2908-05WB-MG, Category=Connectors,Interconnects, Connector Type=ConnectorandEjector, Contact Finish=Gold, Contact Finish Thickness=15µin(0.38µm), Datasheet URL=http://datasheet.octopart.com/2908-05WB-MG-3M-datasheet-6398107.pdf, Datasheet Version=Oct-06, Ejector Side=-, Family=MemoryConnectors-PCCardSockets, Featured Product=3MCardConnectormicroSD, Features=Switch, Height Above Board="0.073\"(1.85mm)", Insertion, Removal Method=PushIn,PushOut, Manufacturer URL=http://www.3m.com/, Mounting Feature=Normal,Standard-Top, Mounting Type=SurfaceMount,RightAngle, Number of Positions=10(8+2), Online Catalog=2900Series, Other Names=3M5607CT, Other Related Documents=SDCardDateCodeDecipher, Package Reference=2908-05WB-MG, Packaging=CutTape(CT), PCN Obsolescence/ EOL=2908Series30/Jun/2010, Series=2900
U2: "SiRFstarIVâ„¢ RF Receiver GPS 1.575GHz -163dBm 115.2kbps Module", Package="Module Maestro Wireless", Availability=Unavailable, MF="Maestro Wireless", MP=A2200-A, Price=None, SnapEDA_Link=https://www.snapeda.com/parts/A2200-A/Maestro%20Wireless%20Solutions/view-part/51723/?ref=snap

## Free pads (board coordinates)
  round 6 hole 4.5: 3(11.95,30.4) 5(67.85,36.3)

## Via types
v1: diameter 0.5, hole 0.25, Top Layer to Bottom Layer, 47 vias
v2: diameter 0.55, hole 0.25, Top Layer to Bottom Layer, 4 vias
v3: diameter 2, hole 1, Top Layer to Bottom Layer, 2 vias
v4: diameter 0.7, hole 0.35, Top Layer to Bottom Layer, 1 vias

## Nets (pads, with @x,y where several pads share a name; then routed paths per layer and width w, separated by ;. In a path a pad name is that pad's centre, name@x,y a point inside that pad or via, vN(x,y) a via of type N, cw(c..) or ccw(c..) an arc to the next point about the centre after c; other vN are vias at no path point)
+1v8: R5.2 R7.1 U2.2 | length 26.1
  Top Layer w0.254: v1(3.6,22.6) 3.6,14.504 U2.2 ; v1(6.1,27.9) 6.8,27.2 R7.1
  Bottom Layer w0.254: v1(3.6,22.6) 6.1,25.1 ; v1(6.1,27.9) 6.1,25.1 ; R5.2 13.5,22.8 11.2,25.1 6.1,25.1
+3v3: C1.2 C2.2 C3.2 C5.1 C6.1 J9.1 MD1.2 R1.2 R4.2 SD1.4 U1.8 | length 40.5
  Top Layer w0.254: U1.8 11.5,40.908 11.7,41.108 C2.2
  Top Layer w0.5: C6.1 4.866,28.766 v1(4.88,28.78) 6.4,30.3 R4.2 ; C2.2 C3.2 C1.2 ; C5.1 15.8,38.825 C1.2 ; J9.1 15.8,52.05 MD1.2 17.6,45.77 17.6,44 16.8,43.2 C1.2 ; R1.2 v1(36.6,41.2)
  Bottom Layer w0.254: v1(31.3,42) 31.3,47.64 SD1.4
+12: C8.2 D1.1 D2.2 J8.1 K1.2 MD1.26 Q2.1 Q2.2 Q2.3 R2.2 | length 115.2
  Top Layer w0.5: v1(45.6,41) J8.1
  Top Layer w1: R2.2 37.65,32.8 MD1.26
  Top Layer w2: D1.1 44.1,7.4 48.2,3.3 K1.2 58.2,3.3 72.4,17.5 72.4,38.7 70.7,40.4 70.7,48.14
  Bottom Layer w3: MD1.26@40.191,35.341 44.2,35.341
  Bottom Layer w3.5: 44.212,35.638 44.212,39.612 v1(45.6,41) 56.1,51.5 v3(61.7,51.5)
"Battery Measure": J7.1 MD1.8 R2.1 R3.2 | length 41.5
  Top Layer w1: J7.1 18.3,61.8 25.2,54.9 R2.1 ; MD1.8@19.87,32.8 R3.2 24.9,32.8 R2.1@25,32.9
CS_MOTION: J12.1 MD1.6 U1.12 | length 20.4
  Top Layer w0.254: J12.1 7.7,44.1 8.8,43 v1(8.8,40.1) 8.769,40.069 8.769,39.331 8.94,39.16 U1.12
  Bottom Layer w0.254: v1(8.8,40.1) 17.59,40.1 MD1.6
CS_SD: J11.1 MD1.25 SD1.2 | length 37.6
  Top Layer w0.254: v1(38.9,52) J11.1
  Bottom Layer w0.254: SD1.2 29.2,48.34 29.2,49.3 29.6,49.7 36.6,49.7 ; v1(38.9,52) 36.6,49.7 ; MD1.25 39.03,32.77 38.1,33.7 38.1,48.2 36.6,49.7
GND: C1.1 C2.1 C3.1 C4.1 C5.2 C6.2 C7.1 C8.1 J2.2 J2.3 J2.4 J2.5 J10.1 L1.4 MD1.4 pad.3 pad.5 Q1.2 R3.1 R6.2 R9.1 SD1.6 SD1.9 SD1.10 SD1.11 SD1.12 U1.2 U1.3 U1.6 U1.7 U1.10 U1.11 U2.7 U2.8 U2.10 U2.23 U2.24 U2.25 U2.26 U2.27 U2.28 U2.29 U2.30 U2.31 | length 63.5
  Top Layer w0.254: v1(9.6,41.3) 9.6,41.238 10,40.838 U1.11 U1.10 ; U1.2 U1.3 11,36.5 11.39,36.11 v1(11.41,36.11) ; U1.6 U1.7 11.865,39.162 14.338,39.162 v1(14.354,39.178) 14.354,38.579 14.35,38.575 C5.2@14.35,37.775 ; v1(17.1,17.9) C7.1
  Top Layer w0.5: v1(3.371,26.46) 3.374,26.463 4.466,26.463 C6.2@5.266,26.463 ; v1(9.6,41.3) 9.6,44.2 10.4,45 C1.1 ; v1(9.968,12.932) U2.7 U2.8 ; C2.1 J10.1 ; R3.1 v1(23,36.9) ; C4.1 v1(35.7,36.1) ; v1(42.864,14.126) 42.9,14.162 Q1.2 Q1.2@42.9,15.95 ; R9.1 73.9,41.704 v1(73.904,41.7)
  Top Layer w1: v2(12.3,12.9) v2@13.714,12.9 ; v2@13.778,12.953 13.778,16.161 v2@15.048,16.161
  Bottom Layer w0.254: v1(6.685,20.349) 6.691,20.355 8.71,20.355 v1(8.717,20.361)
  Bottom Layer w0.5: 7.689,20.36 7.689,21.289 R6.2 ; SD1.11 29.45,60.01 v1(29.453,60.014) ; SD1.6 33.56,45.519 v1(33.565,45.513) ; v1(34.9,60) 34.9,58.25 SD1.10 ; SD1.9 36.55,42.35 v1(36.6,42.3)
  Bottom Layer w1.5: MD1.4 19.853,42.943 22.443,42.943 23.4,43.9 SD1.12
  other v1: 9.72,17.327 7.701,17.339 6.71,18.33 8.679,18.33 10.673,18.33 10.686,20.361
  other v2: 13.714,12.889 15.083,16.2 13.773,16.23
  other v3: 59,44.6
GPS_ON: MD1.19 U2.6 | length 35.7
  Top Layer w0.254: v1(8.7,12.9) U2.6@8.7,14.434
  Bottom Layer w0.254: v1(8.7,12.9) 9.6,12 16.3,12 18.052,13.752 36.382,13.752 MD1.19
GPS_RST: MD1.9 U2.22 | length 27.3
  Top Layer w0.254: v1(1.8,30.1) 1.8,26.1 2.348,25.552 U2.22
  Bottom Layer w0.254: v1(1.8,30.1) 3.6,31.9 7.8,31.9 9.8,33.9 16.17,33.9 MD1.9
Horn: MD1.23 R8.2 | length 6.2
  Top Layer w0.5: MD1.23 43.843,24.007 43.843,23.057 R8.2
INT1: MD1.7 U1.4 | length 9.2
  Top Layer w0.254: U1.4 13.3,37.3 15.29,35.31 MD1.7
INT2: MD1.5 U1.9 | length 10.5
  Top Layer w0.254: U1.9 v1(11,41.3)
  Bottom Layer w0.254: v1(11,41.3) 18.93,41.3 MD1.5
MISO: J4.1 MD1.13 SD1.7 U1.1 | length 64.5
  Top Layer w0.254: J4.1 v1(8.5,35.1) ; U1.1 10,36.628 11.528,35.1 v1(13.5,35.1) v1(16.2,32.4)
  Bottom Layer w0.254: v1(8.5,35.1) v1(13.5,35.1) ; v1(16.2,32.4) 16.2,23.71 MD1.13 34.66,34.89 SD1.7
MOSI: J1.1 MD1.12 SD1.3 U1.14 | length 54.5
  Top Layer w0.254: J1.1 5.458,38.158 U1.14@9.326,38.158 ; U1.14@9.525,38.16 9.523,38.158 9.523,36.077 11.5,34.1 13.3,34.1 16.5,30.9 16.5,25.95 MD1.12 ; v1(30.3,34) v1(30.3,42)
  Bottom Layer w0.254: MD1.12 30.3,33.07 v1(30.3,34) ; SD1.3 30.3,47.86 v1(30.3,42)
NetC4_2: C4.2 MD1.27 R1.1 | length 6.3
  Top Layer w0.5: C4.2 33.925,37.875 40.135,37.875 MD1.27
NetC5_3: C5.3 U1.5 | length 1.4
  Top Layer w0.254: U1.5@12.173,38.162 C5.3@13.536,38.162
NetC6_3: C6.3 U2.20 | length 1.5
  Top Layer w0.254: C6.3@4.841,25.682 4.841,25.654 4.888,25.607 U2.20
NetC7_2: C7.2 R4.1 U2.9 | length 23.2
  Top Layer w0.254: R4.1 8.6,28.5 11.161,25.939 v1(15.034,25.939) ; v1(12.5,16.2) 12.5,14.494 U2.9 ; v1(12.5,18) 15.011,20.511 v1(15.011,21.325) 17.075,21.325 C7.2
  Bottom Layer w0.254: v1(12.5,16.2) v1(12.5,18) ; v1(15.011,21.325) 15.011,25.916 v1(15.034,25.939)
NetD1_2: D1.2 K1.5 Q1.3 | length 12.4
  Top Layer w1: D1.2 44.1,11.9 44.45,12.25 44.514,12.25 45.1,12.836 Q1.3 49.9,16.7 K1.5
NetD2_1: D2.1 Q2.4 R9.2 | length 7.2
  Top Layer w0.5: Q2.4@70.537,49.773 72.527,49.773 73.9,48.4 73.9,47.525 73.875,47.5 D2.1 73.888,47.288 73.888,45.212 R9.2
NetD3_1: D3.1 E2.A2 L1.3 | length 11.5
  Top Layer w0.75: D3.1 v4(47.7,38.9)
  Bottom Layer w0.75: v4(47.7,38.9) 52.55,38.9 E2.A2@55.25,36.2
NetD3_2: D3.2 E2.A1 L1.1
NetE1_A1: E1.A1 K1.3 | length 24
  Bottom Layer w2.8: E1.A1@55.25,21 60.25,21 60.25,6.55 K1.3
NetE1_A2: E1.A2 F1.2
NetF1_1: F1.1 K1.1 | length 23.6
  Top Layer w2.8: K1.1 58.498,9.3 F1.1@68.7,19.502
NetF2_1: F2.1 L1.2
NetF2_2: F2.2 Q2.5-6-7-8
NetJ2_1: J2.1 U2.11 | length 8.5
  Top Layer w0.336: J2.1 13.586,10.264 15.048,11.726 U2.11
NetQ1_1: Q1.1 R8.1 | length 3.8
  Top Layer w0.5: Q1.1@42.9,17.85 42.9,18.9 43.9,19.9 R8.1
NetR5_1: R5.1 U2.15 | length 3
  Top Layer w0.254: U2.15 11.3,24.124 v1(11.3,22.6)
  Bottom Layer w0.254: v1(11.3,22.6) 11.7,22.2 R5.1
NetR6_1: R6.1 U2.16 | length 3
  Top Layer w0.254: U2.16 10,24.154 v1(10,22.6)
  Bottom Layer w0.254: R6.1 9.6,22.2 v1(10,22.6)
NetR7_2: R7.2 U2.17 | length 2.2
  Top Layer w0.5: R7.2 8.649,26.251 8.649,24.235 U2.17
RX: J3.1 MD1.14 U2.3 | length 39.3
  Top Layer w0.254: U2.3 4.907,14.505 4.907,15.468 5.531,16.092 5.992,16.092 v1(6,16.1) ; MD1.14 23.17,17.53 33.4,7.3 J3.1
  Bottom Layer w0.254: v1(6,16.1) 9.708,16.1 12.408,18.8 18.57,18.8 MD1.14
SCLK: J6.1 MD1.11 SD1.5 U1.13 | length 55.2
  Top Layer w0.254: J6.1@5.3,41 7.461,41 8.1,40.361 v1(8.1,39) 8.167,39 8.507,38.66 U1.13 ; v1(17.7,33.5) 17.7,27.29 MD1.11
  Bottom Layer w0.254: v1(8.1,39) 12.2,39 v1(17.7,33.5) ; MD1.11 32.46,37.77 SD1.5
TX: J5.1 MD1.15 U2.4 | length 30.2
  Top Layer w0.254: U2.4 6.158,14.836 7.422,16.1 11.492,16.1 12.592,17.2 17.63,17.2 MD1.15 26.8,8.03 J5.1
pads on no net: MD1. MD1.1 MD1.3 MD1.10 MD1.16 MD1.17 MD1.18 MD1.20 MD1.21 MD1.22 MD1.24 MD1.28 SD1.1 SD1.8 U2.1 U2.5 U2.12 U2.13 U2.14 U2.18 U2.19 U2.21

## Polygon pours and split planes (outlines as drawn)
GND on Top Layer "GND_L01_P033" (solid, pour order 33): 11.5,16.5 11.5,22 4,22 4,16.5
GND on Top Layer "GND_L01_P032" (solid, pour order 32): 53.8,47.1 54.4,46.5 55.3,46.5 56.7,45.1 56.7,38.984 57.284,38.4 64.9,38.4 65.5,39 65.5,45 65,45.5 60.7,45.5 58.5,47.7 58.5,50.7 57.6,51.6 53.8,51.6
NetD3_1 on Top Layer "NETD3_1_L01_P031" (solid, pour order 31): 53.8,44.6 54.2,45 56,45 56.4,44.6 56.4,38.5 56.9,38 61.2,38 62,37.2 62,33.7 61.6,33.3 55.3,33.3 53.8,34.8
NetF2_1 on Top Layer "NETF2_1_L01_P028" (solid, pour order 28): 49.8,46.5 52.9,46.5 53.5,47.1 53.5,52.5 54.5,53.5 57.933,53.5 58.5,54.067 58.5,57 58,57.5 50,57.5 49.2,56.7 49.2,47.1
NetD3_2 on Top Layer "NETD3_2_L01_P026" (solid, pour order 26): 49.2,44.502 49.7,45.002 53.098,45.002 53.5,44.6 53.5,34.4 54.9,33 61.1,33 62,32.1 62,29.6 61.4,29 46.502,29.006 45.7,29.799 45.7,33.5 46.7,34.5 48.84,34.5 49.2,34.86
NetF2_2 on Top Layer "NETF2_2_L01_P030" (solid, pour order 30): 59.6,53.4 59,54 59,57 59.5,57.5 69.7,57.5 70.864,56.336 70.864,52 68.2,52 66.8,53.4
+12 on Top Layer "+12_L01_P029" (solid, pour order 29): 59.5,47.5 60.9,46.1 71.1,46.1 71.7,46.7 71.7,49.8 71,50.5 67.5,50.5 67,51 67,52.6 66.6,53 60,53 59.5,52.5
NetF1_1 on Top Layer "NONET_L-01_P-001" (solid, remove dead copper, pour order 8): 47.524,10.084 59.911,21.4 70.845,21.4 70.845,1.5 47.5,1.5
NetE1_A2 on Top Layer "NONET_L-01_P-001" (solid, pour order 17): 50.5,23 51.1,22.4 69.9,22.4 71.008,23.508 71.008,27.392 69.9,28.5 61,28.5 51.5,28.5 50.5,27.5
NetE1_A1 on Bottom Layer "NONET_L-01_P-001" (solid, remove dead copper, pour order 10): 53,21.5 55,23.5 64.5,23.5 69,19 69,6 64.5,1.5 57.5,1.5 53,6
+3v3 on PWR (split plane): 256 vertices, not listed, extent 0.41,0.766 79.384,63.74
GND on GND (split plane): 256 vertices, not listed, extent 0.41,0.766 79.384,63.74

## Other copper
GND (plane layer: these items are gaps in the copper):
  lines w0.254: 5.323,6.823 6.147,6 ; 8.5,0.5 11.5,0.5 ; 17.5,0.5 18,0.5

## Silkscreen, mask and mechanical layers (free items; w line width, h text height)
Top Overlay:
  lines w0.3: 11.2,50.4 10.2,51.4 ; 11.2,52.4 10.2,51.4 ; 12.2,49.4 13.2,48.4 ; 14.2,49.4 13.2,48.4 ; 10.2,51.4 13.2,51.4 13.2,48.4
  text "2021-10-05" at 42.199,61.917 h1.5
  text "BAT MSR" at 17.754,61.254 h1
  text "SaFe Moto" at 50.854,59.954 h2
  text "REV B" at 43.454,59.554 h1
  text "GND" at 10.354,58.154 h1
  text "3v3" at 14.454,58.154 h1
  text "CS SD" at 43.354,54.554 h1
  text "Z" at 14.254,51.054 h1
  text "Y" at 8.454,50.954 h1
  text "X" at 14.954,48.254 h1
  text "CS MOT" at 2.754,46.554 h1
  text "12V" at 44.354,46.554 h1
  text "CLK" at 2.246,41.254 h1 r90
  text "MOSI" at 2.246,36.754 h1 r90
  text "GND" at 72.654,35.554 h2
  text "MISO" at 2.246,32.054 h1 r90
  text "VANT" at 2.554,29.954 h1
  text "+12" at 72.754,29.954 h2
  text "Horn" at 75.546,19.854 h2 r90
  text "JLCJLCJLCJLC" at 54.697,9.417 h1.5
  text "TX" at 22.154,3.154 h1
  text "RX" at 36.654,3.154 h1
Board Shape:
  the board outline again, w1
Top Assembly:
  text "Change +CAP to diff size" at 49.8,74.144 h5